# EAGLE board Swanky Bruticus-Waasa (EAGLE 9.7.0)

Size 163.01 x 82.4 mm. Coordinates in mm from the lower left corner, seen from the top.
Outline: 0,0 163.01,0 163.01,82.4 0,82.4 0,0
Copper layers (1*16): Top 0.035mm / dielectric 1.5mm / Bottom 0.035mm
Design rules "default": minimum track width 6mil, minimum drill 0.35mm, track to track 6mil, track to pad 6mil, pad to pad 6mil, via to via 6mil, smd to smd 6mil, copper to edge 40mil, drill to drill 6mil, minimum pad ring 10mil, minimum via ring 8mil, stop-mask expansion 4mil, vias tented up to drill 0mil, thermal gap 10mil

## Footprints (pad centres in the part's own frame; a part is rotated, then mirrored left to right if it is on the bottom)
LEDRD254W60D565H860B = drill 0.981 pad 1.581: 1 -1.27,0; 2 1.27,0
LEDRD254W60D565H860B_B = drill 0.981 pad 1.581: 1 -1.27,0; 2 1.27,0
RESAD1016W63L850D250B = drill 0.83 pad 1.43: 1 -5.08,0; 2 5.08,0
SWITCH-MOMENTARY-PTH-6.5MM = drill 1.016 pad 1.88: 1 -3.251,2.261; 2 3.251,2.261; 3 -3.251,-2.261; 4 3.251,-2.261
ARDUINO-UNO-R3-SHIELD = drill 1.016 pad 1.88: 3.3V 24.13,-2.54; 5V 24.13,0; A0 24.13,12.7; A1 24.13,15.24; A2 24.13,17.78; A3 24.13,20.32; A4 24.13,22.86; A5 24.13,25.4; AREF -24.13,-13.97; D2 -24.13,20.32; D3 -24.13,17.78; D4 -24.13,15.24; D5 -24.13,12.7; D6 -24.13,10.16; D7 -24.13,7.62; D8 -24.13,3.81; D9 -24.13,1.27; D10 -24.13,-1.27; D11 -24.13,-3.81; D12 -24.13,-6.35; D13 -24.13,-8.89; GND@0 24.13,2.54; GND@1 24.13,5.08; GND@2 -24.13,-11.43; IOREF 24.13,-7.62; NC 24.13,-10.16; RES 24.13,-5.08; RX -24.13,25.4; SCL -24.13,-19.05; SDA -24.13,-16.51; TX -24.13,22.86; VIN 24.13,7.62

## Placement (x,y rotation side)
D1  RED  [LEDRD254W60D565H860B]  147.48,71.06 90 top
D2  BLUE  [LEDRD254W60D565H860B_B]  155.1,71.06 90 top
D6  BLUE  [LEDRD254W60D565H860B_B]  132.24,71.06 90 top
D7  RED  [LEDRD254W60D565H860B]  124.62,71.06 90 top
D8  BLUE  [LEDRD254W60D565H860B_B]  119.54,71.06 90 top
D9  RED  [LEDRD254W60D565H860B]  114.46,71.06 90 top
D10  BLUE  [LEDRD254W60D565H860B_B]  111.92,71.06 90 top
D11  RED  [LEDRD254W60D565H860B]  109.38,71.06 90 top
D12  BLUE  [LEDRD254W60D565H860B_B]  106.84,71.06 90 top
D13  RED  [LEDRD254W60D565H860B]  104.3,71.06 90 top
R1  1000  [RESAD1016W63L850D250B]  142.4,67.25 90 top
S1  SWITCH_MOMENTARY  [SWITCH-MOMENTARY-PTH-6.5MM]  127.16,48.2 90 top
U1  ARDUINO-UNO-R3-SHIELD  [ARDUINO-UNO-R3-SHIELD]  29.84,47.88 0 top

## Library data of the parts
D1 D7 D9 D11 D13 = Tinkercad; CATEGORY: Opto-Electronic; SUB-CATEGORY: LED; VALUE: LED_RED
D2 D6 D8 D10 D12 = Tinkercad; CATEGORY: Opto-Electronic; SUB-CATEGORY: LED; VALUE: LED_BLUE
R1 S1 U1 = Tinkercad

## Nets
S1_4: D1.1 D2.1 D6.1 D7.1 D8.1 D9.1 D10.1 D11.1 D12.1 D13.1 S1.3 S1.4
U1_5V: S1.1 S1.2 U1.5V
U1_GND: D1.2 D2.2 D6.2 D7.2 D8.2 D9.2 D10.2 D11.2 D12.2 D13.2 R1.2 U1.GND@0 U1.GND@1 U1.GND@2

## Tracks (layer width: path | path; a pad name or v marks a point on that pad's centre or on a via)
S1_4  (11 unrouted)
U1_5V  (2 unrouted)
U1_GND  (13 unrouted)